# Altium PCB pcb.PcbDoc
Units mm, origin at the board's own origin, x right, y up, seen from the top; angles counter-clockwise.
Board outline 64.95 x 35.99 mm, 2 copper layers (Top Layer, Bottom Layer); 19 components, 15 nets, 76 pads, 13 vias.
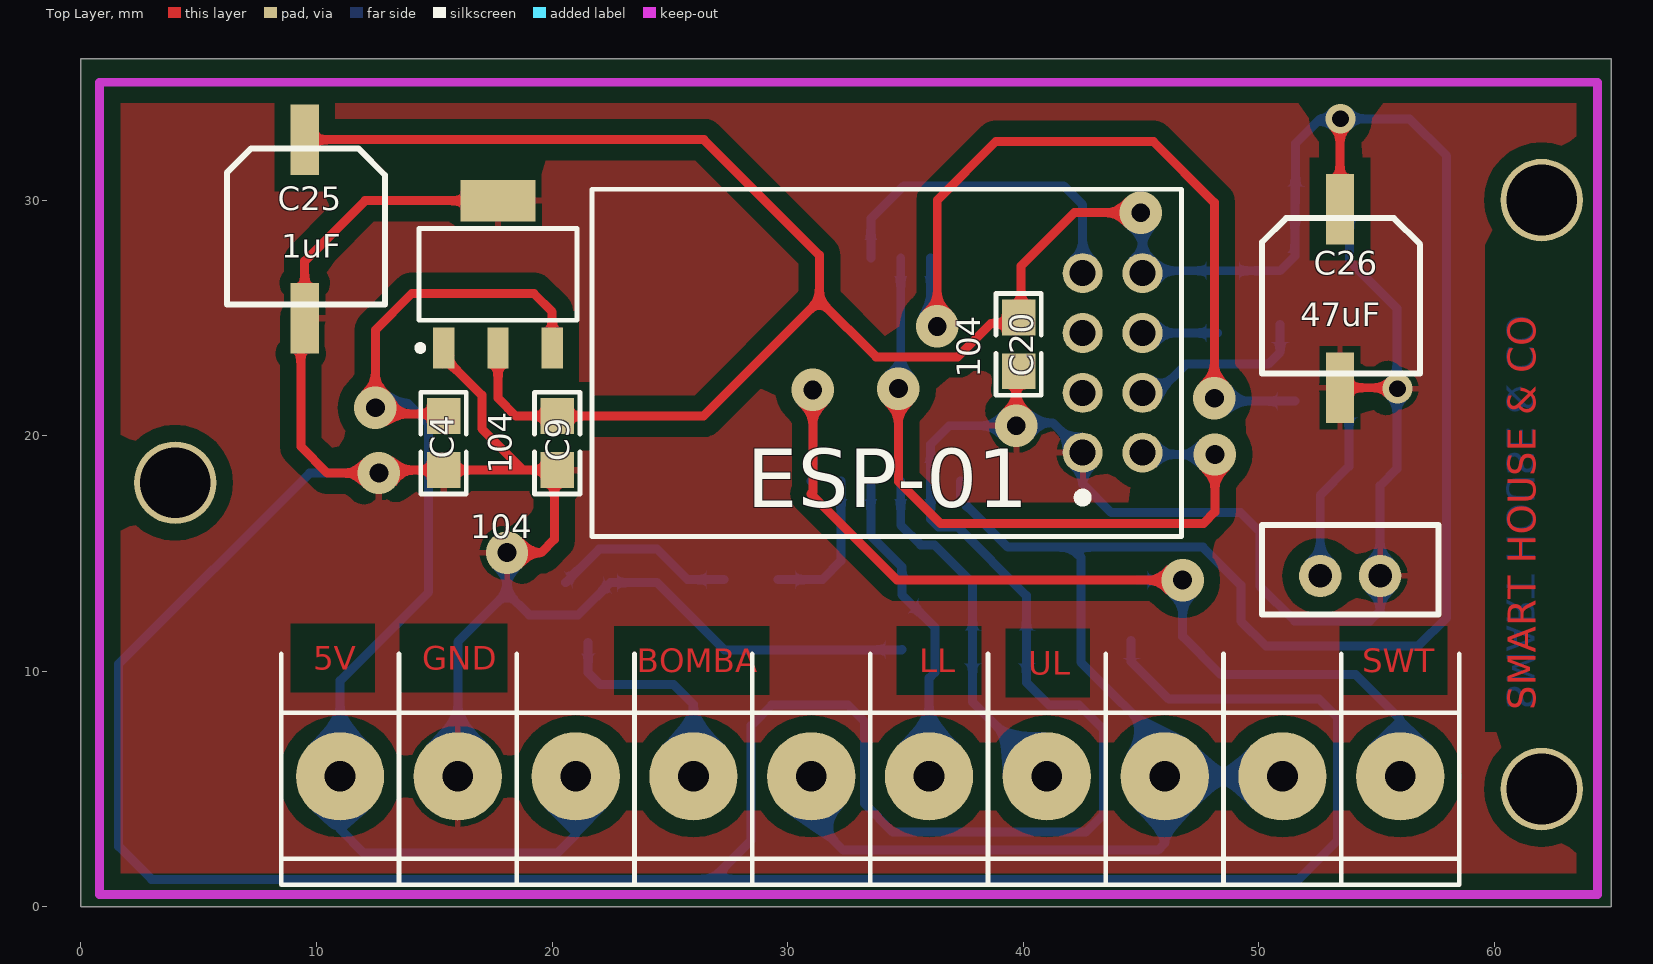
[diagram p0: Top Layer view]
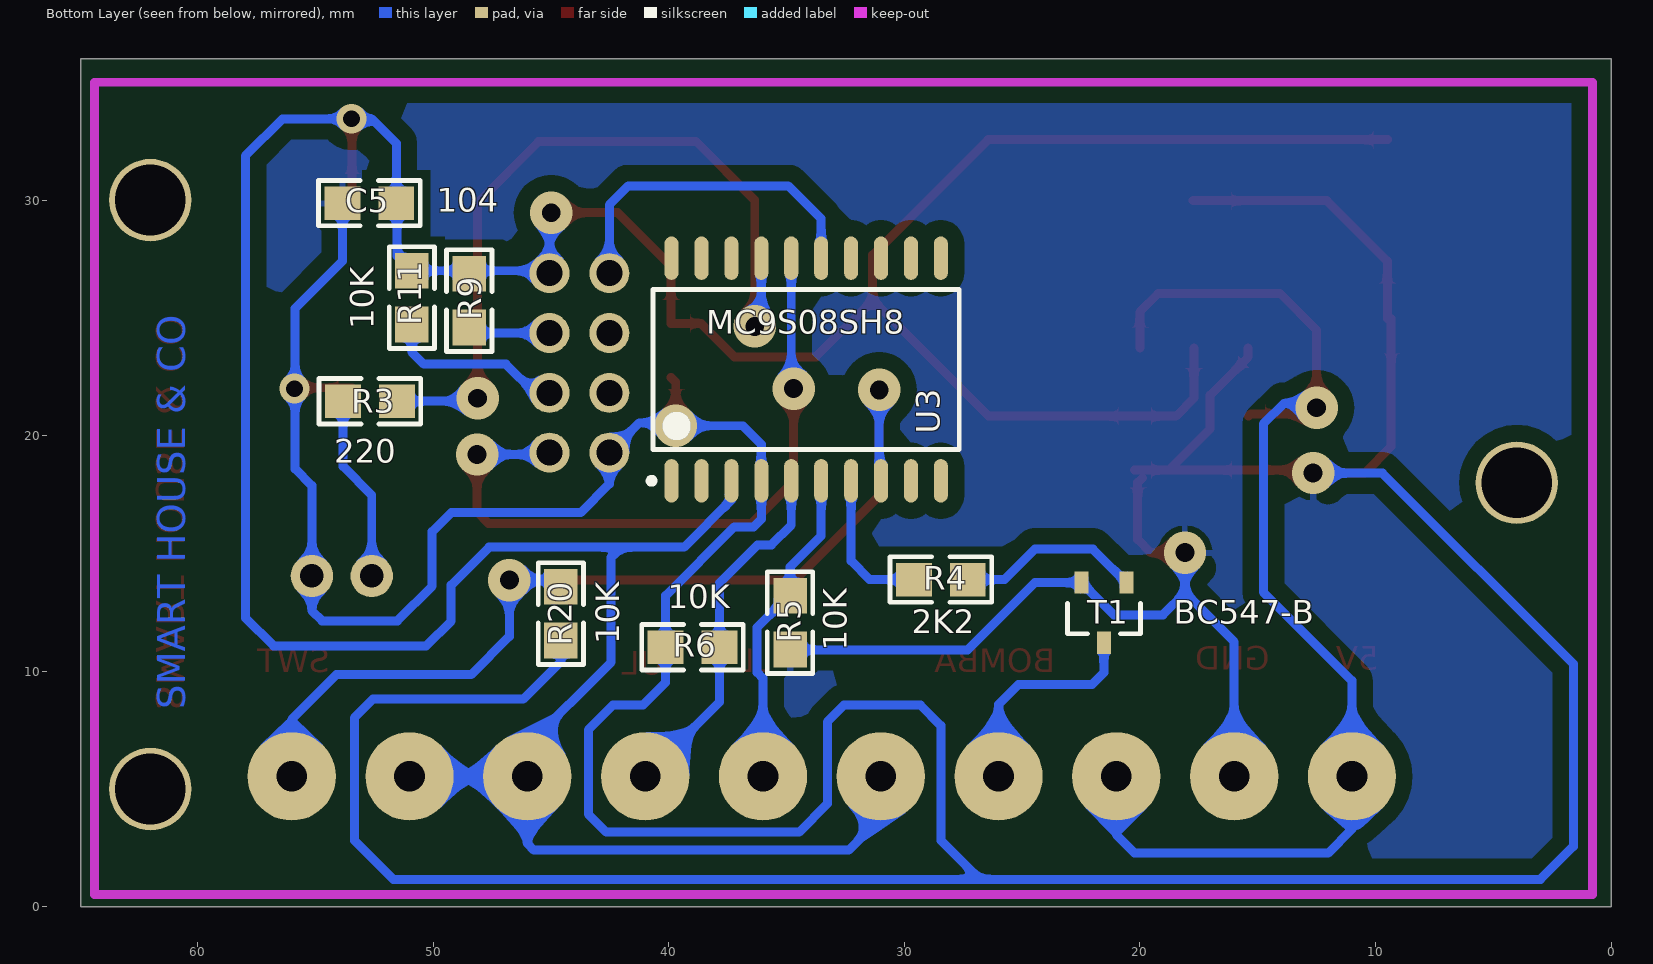
[diagram p1: Bottom Layer view, seen from below]

## Layer stack, top to bottom
Top Solder: solder mask 0.0102, Solder Resist, Dk 3.5
Top Layer: signal copper 0.0356
Dielectric 1: dielectric 0.32, FR-4, Dk 4.8
Bottom Layer: signal copper 0.0356
Bottom Solder: solder mask 0.0102, Solder Resist, Dk 3.5

## Board outline
0,0 64.948,0 64.948,35.992 0,35.992

## Design rules (kind name [scope] priority, off if disabled: settings)
Clearance POLYGON [All vs InPolygon] p1: gap=0.7
Clearance [All] p2: gap=0.2
PolygonConnect [All] p1: connectstyle=Relief reliefconductorwidth=0.254 reliefentries=4 polygonreliefangle="90 Angle" airgapwidth=0.254
RoutingVias [All] p1: holewidth=0.711 width=1.27 viastyle="Through Hole" minholewidth=0.711 minwidth=1.27 maxholewidth=0.711 maxwidth=1.27
SolderMaskExpansion [All] p1: expansion=0.102
UnpouredPolygon [All] p1: allowunpoured=FALSE
Width [All] p1: maxlimit=0.508 minlimit=0.254 preferedwidth=0.381 minimp=50.000000 maximp=50.000000 favimp=50.000000
29 further rules are at their usual default settings.

## Classes and differential pairs
component class esquema: C4 C5 C9 C20 C25 C26 R3 R4 R5 R6 R9 R11 R20 T1 U3 ""

## Components (designator, comment, footprint, x,y, rotation, side; value= is the part's Value field where it differs from the comment)
* "ESP-01" ESP-01 45.06,19.279 r90 top
C4 "104" 0805 15.392,19.685 r270 top
C5 "104" 0805 52.705,29.87 r180 bottom
C9 "104" 0805 20.218,19.685 r270 top
C20 "104" 0805 39.802,23.876 r270 top
C25 "1uF" CAP_SMD 9.5,28.88 r270 top
C26 "47uF" CAP_SMD 53.442,25.933 r270 top
D25 "LED" conector-led 57.683,16.205 r180 top
J78 "BORNERA10" BORNERA10 28.499,5.537 r90 top
R3 "220" 0805 52.68,21.463 r180 bottom
R4 "2K2" 0805 28.448,13.894 r0 bottom
R5 "10K" 0805 34.849,12.065 r90 bottom
R6 "10K" 0805 38.989,11.024 r180 bottom
R9 "" 0805 48.463,25.73 r270 bottom
R11 "10K" 0805 50.902,25.857 r270 bottom
R20 "10K" 0805 44.577,12.446 r90 bottom
T1 "BC547-B" SOT23 20.574,13.767 r0 bottom
U3 "MC9S08SH8" SH8 34.163,22.809 r90 bottom
U25 "AMS1117" AMS1117 17.704,26.848 r90 top

## Footprints (in the part's own frame and the unit in brackets; to place one, negate y for a bottom-side part, rotate by r counter-clockwise, add the part's x,y. Pads: shape width x height; smd on the part's side, far side on the other; paste and mask are expansions set on the pad)
0805 [mil] "Pasivo 0805"
  rect 60x56 smd: 1(-45,0) 2(45,0)
  silkscreen extent -85,-38 85,38, body extent -40,-25 39,25, height 15
AMS1117 [mm] "SOT223, 4-Leads, Body 6,50x7,00mm (avg), Pitch 2,30mm, IPC Medium Density"
  rect 1.75x0.9 smd: 1(-3.125,-2.3) 2(-3.125,2.3) 3(-3.125,0)
  rect 1.75x3.2 smd: 2(3.125,0)
  silkscreen extent -3.25,-3.35 1.95,3.42, body extent -3.48,-3.25 3.48,3.25, height 1.7
BORNERA10 [mm] "Bornera con Tornillos 5mm separaci�n"
  round 3.75 hole 1.3: 1(0,17.5) 2(0,12.5) 3(0,7.5) 4(0,2.5) 5(0,-2.5) 6(0,-7.5) 7(0,-12.5) 8(0,-17.5) 9(0,-22.5) 10(0,-27.5)
  silkscreen extent -4.6,-30 5.2,20, body extent -3.76,-29.89 3.94,20.61, height 10
CAP_SMD [mm]
  rect 3x1.2 smd: 1(-3.683,0) 2(3.899,0)
  silkscreen extent -3.3,-3.3 3.3,3.4, body extent -3.9,-3.4 3.9,3.4, height 8.05
conector-led [mm]
  round 1.8 hole 1: 1(5.08,2.159) 2(2.54,2.159)
  silkscreen extent 0.06,0.01 7.56,3.8, body extent 0.06,0.01 7.56,3.81, height 6
ESP-01 [mm]
  round 1.7 hole 1.1: 1(0,2.54) 2(2.54,2.54) 3(5.08,2.54) 4(7.62,2.54) 5(0,0) 6(2.54,0) 7(5.08,0) 8(7.62,0)
  silkscreen extent -3.56,-1.65 11.18,23.37, body extent -3.43,-1.52 11.07,23.28, height 5.88
SH8 [mm] "SOP, 20-Leads, Body 12,80x7,50mm, Pitch 1,27mm, IPC Medium Density"
  oval 1.85x0.6 smd: 1(-4.725,5.715) 2(-4.725,4.445) 3(-4.725,3.175) 4(-4.725,1.905) 5(-4.725,0.635) 6(-4.725,-0.635) 7(-4.725,-1.905) 8(-4.725,-3.175) 9(-4.725,-4.445) 10(-4.725,-5.715) 11(4.725,-5.715) 12(4.725,-4.445) 13(4.725,-3.175) 14(4.725,-1.905) 15(4.725,-0.635) 16(4.725,0.635) 17(4.725,1.905) 18(4.725,3.175) 19(4.725,4.445) 20(4.725,5.715)
  silkscreen extent -4.85,-6.5 3.4,6.69, body extent -3.8,-6.5 3.8,6.5, height 2.65
SOT23 [mm]
  rect 0.6x0.95 smd: 1(0,0) 2(0.95,2.55) 3(1.9,0)
  silkscreen extent -0.6,0.87 2.5,2.17, body extent -0.53,-0.25 2.47,2.88, height 1

## Part data
C4 C5 C9 C20: library part CAP, "cap"
C25 C26: library part CAPPOL, "Cap polarizado"
R3 R4 R5 R6 R9 R11 R20: library part RES, "Resistencia"
T1: library part "TRANSISTOR NPN"
U3: "Micro controlador"

## Free pads (board coordinates)
  round 3.5 hole 3: 0(4,18) 1(62,5) 1(62,30)

## Via types
v1: diameter 1.8, hole 0.8, Top Layer to Bottom Layer, 11 vias
v2: diameter 1.27, hole 0.711, Top Layer to Bottom Layer, 2 vias

## Nets (pads, with @x,y where several pads share a name; then routed paths per layer and width w, separated by ;. In a path a pad name is that pad's centre, name@x,y a point inside that pad or via, vN(x,y) a via of type N, cw(c..) or ccw(c..) an arc to the next point about the centre after c; other vN are vias at no path point)
3V3: *.8 C5.2 C9.1 C20.1 C25.1 C26.1 J78.5 J78.8 J78.9 R9.1 R11.1 U3.3 U25.3 | length 170.8
  Top Layer w0.381: C25.1 26.441,32.563 31.344,27.661 31.344,25.756 ; U25.3 17.704,21.59 18.466,20.828 C9.1 26.416,20.828 31.344,25.756 ; v1(44.983,29.464) 42.164,29.464 39.903,27.203 39.903,24.765 38.633,24.765 37.216,23.348 33.752,23.348 31.344,25.756 ; C26.1 53.442,33.426 v2(53.467,33.452)
  Bottom Layer w0.381: J78.5 30.999,3.774 32.36,2.413 45.72,2.413 45.999,2.692 J78.8 ; U3.3 37.338,17.272 39.345,15.265 42.012,15.265 ; v1@45.06,28.702 *.8 45.161,27 R11.1 51.527,27.626 51.527,30.836 ; J78.9 J78.8 ; C5.2 51.562,32.41 52.502,33.35 ; v2@53.467,33.35 52.502,33.35 ; 42.012,15.265 42.443,14.834 42.443,10.389 45.999,6.833 J78.8 ; 42.012,15.265 47.625,15.265 49.238,13.653 49.238,12.129 50.292,11.074 56.769,11.074 57.963,12.268 57.963,31.877 56.388,33.452 v2(53.467,33.452) 52.603,33.452 52.502,33.35
5V: C4.1 J78.1 J78.3 U25.1 | length 51.2
  Top Layer w0.381: C4.1 15.291,20.93 12.497,20.93 v1(12.497,21.184) 12.497,24.486 14.046,26.035 19.228,26.035 20.004,25.259 U25.1
  Bottom Layer w0.381: v1(12.497,21.184) 12.69,21.376 13.881,21.376 14.757,20.5 14.757,13.36 10.999,9.602 J78.1 10.999,3.301 12.014,2.286 20.218,2.286 20.999,3.066 J78.3
BOMBA: R4.2 U3.7 | length 6.4
  Bottom Layer w0.381: R4.2 31.471,13.894 32.258,14.681 U3.7
GND: *.1 C4.2 C5.1 C9.2 C20.2 C25.2 C26.2 D25.2 J78.2 R5.1 R6.1 R20.1 T1.3 U3.4 U25.2 | length 255.3
  Top Layer w0.381: C25.2@9.331,24.981 9.331,19.549 10.465,18.415 v1(12.649,18.415) ; C25.2 9.5,27.407 12.066,29.973 17.704,29.973 U25.2@17.755,29.973 ; v1@12.903,18.542 C4.2 C9.2 ; U25.2@15.404,23.723 15.404,23.331 17.018,21.717 17.018,20.295 18.669,18.644 ; v1(18.085,15.037) 19.533,15.037 20.091,15.596 20.091,18.009 C9.2@19.888,18.212 ; v1(39.7,20.422) 39.7,22.276 C20.2@39.903,22.479 ; C26.2 55.842,22.034 v2(55.88,21.996)
  Bottom Layer w0.381: v1(12.649,18.415) 9.703,18.415 1.6,10.312 1.6,2.565 2.997,1.168 26.797,1.168 ; J78.2 15.999,11.249 18.085,13.335 ; v1(18.085,15.037) 18.085,13.335 ; R5.1 34.837,10.911 27.316,10.911 24.46,13.767 T1.3 21.102,12.395 19.025,12.395 18.085,13.335 ; R20.1 44.577,10.414 46.177,8.814 52.553,8.814 53.34,8.026 53.34,2.819 51.689,1.168 26.797,1.168 ; C5.1 53.848,27.407 55.855,25.4 55.855,18.593 55.143,17.882 D25.2 55.143,12.573 54.712,12.141 51.511,12.141 50.038,13.614 50.038,15.926 49.225,16.739 43.739,16.739 42.52,17.958 *.1 41.25,20.549 39.827,20.549 v1(39.7,20.422) 36.855,20.422 36.068,19.634 U3.4 36.068,16.459 36.398,16.129 37.211,16.129 40.132,13.208 R6.1 40.132,9.525 41.097,8.56 42.367,8.56 43.409,7.518 43.409,3.937 42.647,3.175 34.468,3.175 33.264,4.379 33.264,7.858 32.563,8.56 29.312,8.56 28.448,7.696 28.448,2.819 26.797,1.168
"LOWER LEVEL": J78.6 R5.2 U3.6 | length 13.8
  Bottom Layer w0.381: U3.6 33.528,15.748 34.849,14.427 34.849,13.259 36.246,11.862 36.246,9.957 35.999,9.71 J78.6
Net*_6: *.6 R11.2 | length 7.7
  Bottom Layer w0.381: *.6 45.695,21.819 46.914,23.038 50.394,23.038 50.902,23.546 R11.2
Net*_7: *.7 R9.2 | length 3.2
  Bottom Layer w0.381: *.7 R9.2@48.235,24.359
NetD25_1: D25.1 R3.1 | length 7.9
  Bottom Layer w0.381: D25.1 52.603,17.475 53.823,18.694 R3.1
NetR3_2: R3.2 U3.17 | length 34.3
  Top Layer w0.381: v1(36.347,24.638) 36.347,29.997 38.837,32.487 45.517,32.487 48.108,29.896 v1(48.108,21.59)
  Bottom Layer w0.381: U3.17 36.068,24.968 36.347,24.689 v1(36.347,24.638) ; v1@48.108,21.285 v1(48.108,21.59) 48.235,21.463 R3.2
NetR4_1: R4.1 T1.1 | length 7.9
  Bottom Layer w0.381: T1.1 21.996,15.189 24.46,15.189 25.756,13.894 R4.1
OUT_BOMBA: J78.4 T1.2 | length 9.4
  Bottom Layer w0.381: T1.2 21.524,9.947 22.022,9.449 25.146,9.449 25.999,8.596 J78.4
RXD: *.4 U3.15 | length 14.5
  Bottom Layer w0.381: U3.15 33.528,29.21 34.925,30.607 41.707,30.607 42.52,29.794 *.4
SWITCH: J78.10 R20.2 U3.8 | length 43
  Top Layer w0.381: v1(31.064,21.946) 31.064,17.602 30.988,17.526 34.646,13.868 v1(46.761,13.868)
  Bottom Layer w0.381: U3.8 31.064,18.16 v1(31.064,21.946) ; R20.2@44.856,13.868 v1(46.761,13.868) 46.761,11.481 48.387,9.855 54.102,9.855 55.999,7.958 J78.10
TXD: *.5 U3.16 | length 29.4
  Top Layer w0.381: v1(34.696,21.996) 34.696,18.059 36.474,16.281 47.65,16.281 48.133,16.764 v1(48.133,19.202)
  Bottom Layer w0.381: v1(34.696,21.996) 34.798,22.098 U3.16 ; *.5 45.136,19.202 v1(48.133,19.202)
"UPPER LEVEL": J78.7 R6.2 U3.5 | length 15.5
  Bottom Layer w0.381: U3.5 34.798,16.205 35.636,15.367 36.22,15.367 37.846,13.741 R6.2 37.846,8.69 J78.7
pads on no net: *.2 *.3 U3.1 U3.2 U3.9 U3.10 U3.11 U3.12 U3.13 U3.14 U3.18 U3.19 U3.20

## Polygon pours and split planes (outlines as drawn)
GND on Bottom Layer "POLYGON" (solid, remove dead copper, pour order 2): -2.819,37.135 -1.321,38.633 68.529,38.633 68.529,-1.016 70.612,-3.099 69.291,-1.778 -0.406,-1.778
GND on Top Layer "POLYGON" (solid, remove dead copper, pour order 4): -4.394,39.649 68.224,39.649 69.469,38.405 68.732,37.668 68.732,-3.353 -3.886,-3.353 -4.648,-2.591

## Keep-outs
Keep-Out Layer:
  lines w0.381: 0.787,0.533 0.787,35.001 64.364,35.001 64.364,0.533 0.787,0.533

## Other copper
Top Layer:
  text "5V" at 9.855,10.058 h1
  text "GND" at 14.478,10.058 h1
  text "BOMBA" at 23.597,9.957 h1
  text "LL" at 35.585,9.957 h1
  text "SWT" at 54.381,9.957 h1
  text "UL" at 40.208,9.855 h1
  text "SMART HOUSE & CO" at 61.747,8.357 h1.2 r90
Bottom Layer:
  text "SMART HOUSE & CO" at 60.528,8.382 h1.2 r270

## Silkscreen, mask and mechanical layers (free items; w line width, h text height)
Mechanical 15:
  the board outline again, w0.381